# EAGLE board 10AxisFeatherWingLE (EAGLE 9.5.2)
REV: B
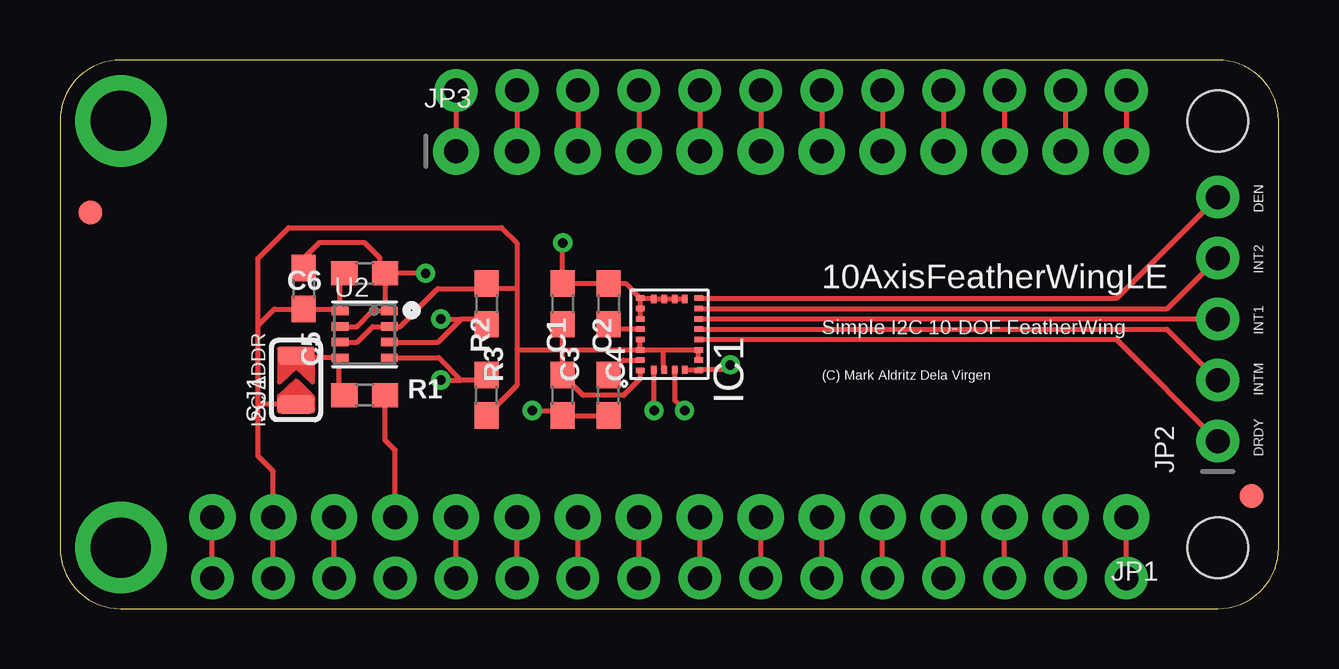
[diagram p0: board, top side]
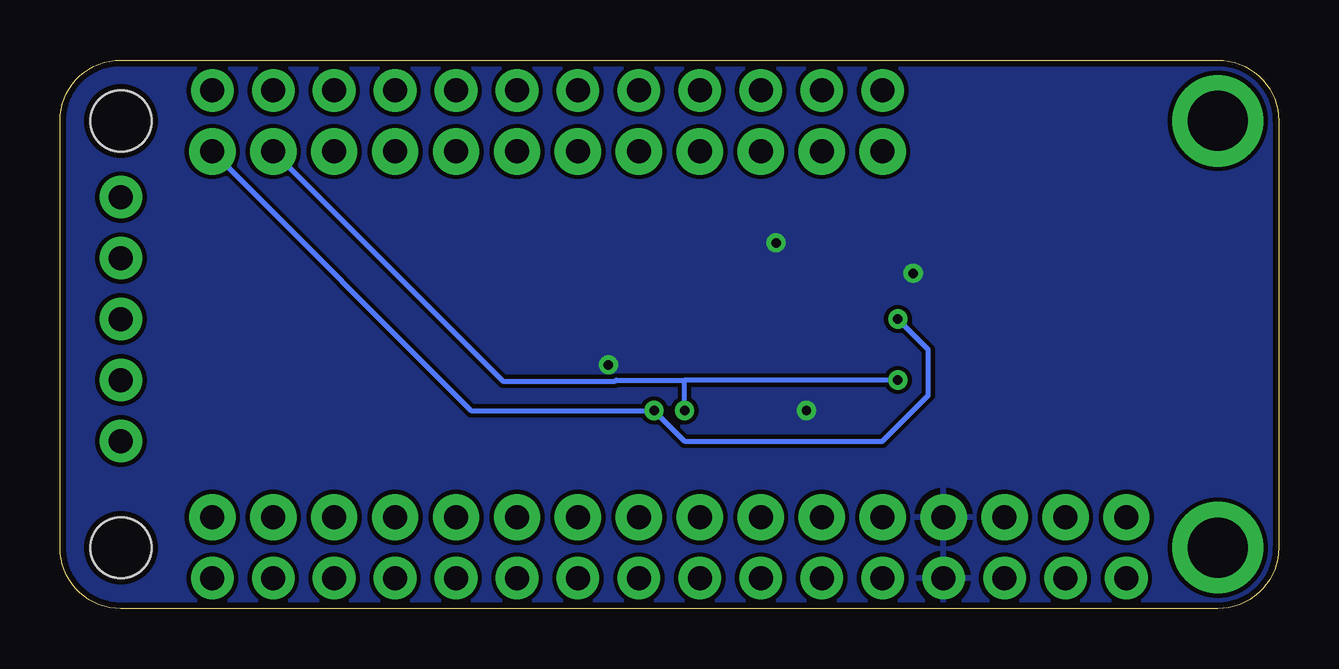
[diagram p1: board, bottom side, seen from below]

Size 50.8 x 22.86 mm. Coordinates in mm from the lower left corner, seen from the top.
Copper layers (1*16): Top 0.035mm / dielectric 1.5mm / Bottom 0.035mm
Design rules "adafruit *": minimum track width 8mil, minimum drill 15.5mil, track to track 7mil, track to pad 7mil, pad to pad 7mil, via to via 7mil, smd to smd 7mil, copper to edge 10mil, drill to drill 8mil, minimum pad ring 10mil, minimum via ring 8mil, stop-mask expansion 2mil, vias tented up to drill 20mil, thermal gap 10mil

## Footprints (pad centres in the part's own frame; a part is rotated, then mirrored left to right if it is on the bottom)
0603-NO = smd 1.1 x 1: 1 -0.85,0; 2 0.85,0
FIDUCIAL_1MM = smd 1 x 1: 1 0,0
LGA24_3.5X3.1MM = smd 0.23 x 0.35: 1 -1.505,1.22; 6 -1.505,-1.22; 7 -1.075,-1.22; 8 -0.645,-1.22; 9 -0.215,-1.22; 10 0.215,-1.22; 11 0.645,-1.22; 12 1.075,-1.22; 13 1.505,-1.22; 18 1.505,1.22; 19 1.075,1.22; 20 0.645,1.22; 21 0.215,1.22; 22 -0.215,1.22; 23 -0.645,1.22; 24 -1.075,1.22 | smd 0.35 x 0.23: 2 -1.475,0.645; 3 -1.475,0.215; 4 -1.475,-0.215; 5 -1.475,-0.645; 14 1.475,-0.645; 15 1.475,-0.215; 16 1.475,0.215; 17 1.475,0.645
1X16_ROUND_76MIL = drill 1 pad 1.93: 1 -19.05,0; 2 -16.51,0; 3 -13.97,0; 4 -11.43,0; 5 -8.89,0; 6 -6.35,0; 7 -3.81,0; 8 -1.27,0; 9 1.27,0; 10 3.81,0; 11 6.35,0; 12 8.89,0; 13 11.43,0; 14 13.97,0; 15 16.51,0; 16 19.05,0
1X05_ROUND_70 = drill 1 pad 1.778: 1 -5.08,0; 2 -2.54,0; 3 0,0; 4 2.54,0; 5 5.08,0
1X12_ROUND_76MIL = drill 1 pad 1.93: 1 -13.97,0; 2 -11.43,0; 3 -8.89,0; 4 -6.35,0; 5 -3.81,0; 6 -1.27,0; 7 1.27,0; 8 3.81,0; 9 6.35,0; 10 8.89,0; 11 11.43,0; 12 13.97,0
FEATHERWING = drill 1 pad 1.778: 1 6.35,1.27; 2 8.89,1.27; 3 11.43,1.27; 4 13.97,1.27; 5 16.51,1.27; 6 19.05,1.27; 7 21.59,1.27; 8 24.13,1.27; 9 26.67,1.27; 10 29.21,1.27; 11 31.75,1.27; 12 34.29,1.27; 13 36.83,1.27; 14 39.37,1.27; 15 41.91,1.27; 16 44.45,1.27; 17 44.45,21.59; 18 41.91,21.59; 19 39.37,21.59; 20 36.83,21.59; 21 34.29,21.59; 22 31.75,21.59; 23 29.21,21.59; 24 26.67,21.59; 25 24.13,21.59; 26 21.59,21.59; 27 19.05,21.59; 28 16.51,21.59 | drill 2.5 pad 3.81: P$1 2.54,20.32; P$2 2.54,2.54 | hole 2.54: 48.26,20.32; 48.26,2.54
SOLDERJUMPER_ARROW_NOPASTE = smd 0.762 x 1.524: 1 -1.016,0; 2 1.016,0
BME280 = smd 0.7 x 0.35: 1 1.025,0.975; 2 1.025,0.325; 3 1.025,-0.325; 4 1.025,-0.975; 5 -1.025,-0.975; 6 -1.025,-0.325; 7 -1.025,0.325; 8 -1.025,0.975

## Placement (x,y rotation side)
C1  10uF  [0603-NO]  20.95,8.89 90 top
C2  0.1uF  [0603-NO]  22.86,8.89 90 top
C3  0.1uF  [0603-NO]  20.95,12.7 270 top
C4  10nF  [0603-NO]  22.86,12.7 270 top
C5  0.1uF  [0603-NO]  10.16,13.34 270 top
C6  10uF  [0603-NO]  12.7,13.97 180 top
FID1  FIDUCIAL_1MM  [FIDUCIAL_1MM]  49.66,4.7 0 top
FID2  FIDUCIAL_1MM  [FIDUCIAL_1MM]  1.27,16.51 0 top
IC1  LSM9DS1  [LGA24_3.5X3.1MM]  25.4,11.43 90 top
JP1  JP1  [1X16_ROUND_76MIL]  25.4,3.81 180 top
JP2  [1X05_ROUND_70]  48.26,12.06 90 top
JP3  JP2  [1X12_ROUND_76MIL]  30.48,19.05 0 top
MS1  FEATHERWING  [FEATHERWING]  0,0 0 top
R1  10K  [0603-NO]  12.7,8.89 0 top
R2  10K  [0603-NO]  17.78,8.89 90 top
R3  10K  [0603-NO]  17.78,12.7 270 top
SJ1  [SOLDERJUMPER_ARROW_NOPASTE]  9.84,9.53 90 top
U2  BME280  [BME280]  12.7,11.43 0 top

## Library data of the parts
C1-C6 = microbuilder; SPICEPREFIX: C
FID1 FID2 = microbuilder; BOM: EXCLUDE
IC1 JP1-JP3 MS1 U2 = microbuilder
R1-R3 = microbuilder; SPICEPREFIX: R
SJ1 = microbuilder; BOM: EXCLUDE; SPICEPREFIX: B

## Nets
3.3V: C1.2 C3.2 C5.2 C6.2 IC1.1 IC1.3 IC1.7 IC1.8 IC1.22 IC1.23 JP1.15 MS1.2 R2.1 R3.1 SJ1.1 U2.2 U2.6 U2.8
5: JP3.10 MS1.19
6: JP3.9 MS1.20
9: JP3.8 MS1.21
10: JP3.7 MS1.22
11: JP3.6 MS1.23
12: JP3.5 MS1.24
13: JP3.4 MS1.25
A0: JP1.12 MS1.5
A1: JP1.11 MS1.6
A2: JP1.10 MS1.7
A3: JP1.9 MS1.8
A4: JP1.8 MS1.9
A5: JP1.7 MS1.10
AREF: JP1.14 MS1.3
C1: C2.2 IC1.24
CAP: C4.2 IC1.21
DEN_A/G: IC1.13 JP2.5
DRDY_M: IC1.9 JP2.1
EN: JP3.2 MS1.27
GND: C1.1 C2.1 C3.1 C4.1 C5.1 C6.1 IC1.5 IC1.6 IC1.14 IC1.15 IC1.16 IC1.17 IC1.18 IC1.19 IC1.20 JP1.13 MS1.4 R1.2 U2.1 U2.7
INT1_A/G: IC1.11 JP2.3
INT2_A/G: IC1.12 JP2.4
INT_M: IC1.10 JP2.2
MISO: JP1.4 MS1.13
MOSI: JP1.5 MS1.12
NC: JP1.1 MS1.16
RESET: JP1.16 MS1.1
RX: JP1.3 MS1.14
SCK: JP1.6 MS1.11
SCL: IC1.2 JP3.11 MS1.18 R2.2 U2.4
SDA: IC1.4 JP3.12 MS1.17 R3.2 U2.3
SDO: R1.1 SJ1.2 U2.5
TX: JP1.2 MS1.15
USB: JP3.3 MS1.26
VBAT: JP3.1 MS1.28

## Tracks (layer width: path | path; a pad name or v marks a point on that pad's centre or on a via)
3.3V
  Top 0.203: C6.2 11.68,13.79 U2.8 11.6,12.48 C5.2 8.93,12.48 8.26,11.81 | U2.6 12.38,11.11 13.03,11.76 U2.2 14.17,11.76 15.75,13.34 17.57,13.34 R3.1 18,13.34 19.05,13.34 | 8.26,8.51 8.26,11.81 | 8.26,8.51 8.26,6.35 8.89,5.71 JP1.15 MS1.2 | SJ1.1 8.26,8.51 | 8.26,11.81 8.26,14.61 9.53,15.88 18.41,15.88 19.05,15.24 19.05,13.34 | 19.05,13.34 19.05,10.79 | 19.05,10.79 19.05,9.31 R2.1 | 19.05,10.79 20.95,10.79 | 20.95,10.79 C3.2 | 20.95,10.79 C1.2 21.8,8.89 23.5,8.89 24.18,9.57 IC1.1 | 20.95,10.79 IC1.23 | IC1.23 IC1.22 | IC1.23 25.15,10.79 | 25.15,10.79 IC1.8 IC1.7 | IC1.3 25.15,9.99 25.15,10.25 25.15,10.79
5
  Top 0.203: MS1.19 JP3.10
6
  Top 0.203: MS1.20 JP3.9
9
  Top 0.203: MS1.21 JP3.8
10
  Top 0.203: MS1.22 JP3.7
11
  Top 0.203: MS1.23 JP3.6
12
  Top 0.203: MS1.24 JP3.5
13
  Top 0.203: MS1.25 JP3.4
A0
  Top 0.203: MS1.5 JP1.12
A1
  Top 0.203: MS1.6 JP1.11
A2
  Top 0.203: MS1.7 JP1.10
A3
  Top 0.203: MS1.8 JP1.9
A4
  Top 0.203: MS1.9 JP1.8
A5
  Top 0.203: MS1.10 JP1.7
AREF
  Top 0.203: MS1.3 JP1.14
C1
  Top 0.203: C2.2 23.48,10.36 IC1.24
CAP
  Top 0.203: IC1.21 23.07,11.64 C4.2
DEN_A/G
  Top 0.203: IC1.13 44.05,12.94 JP2.5
DRDY_M
  Top 0.203: IC1.9 44.03,11.21 JP2.1
EN
  Top 0.203: MS1.27 JP3.2
GND  (via drill 0.39)
  Top 0.203: U2.7 12.39,11.76 13.04,12.4 13.46,12.4 | 13.46,12.4 U2.1 | C6.1 13.55,12.49 13.46,12.4 | C5.1 10.16,14.61 10.79,15.24 12.7,15.24 13.34,14.61 13.34,14.19 C6.1 | JP1.13 13.97,6.6 13.55,7.02 R1.2 | v15.24,13.97 C6.1 | IC1.5 26.59,9.96 | 26.59,9.96 IC1.6 | v27.94,10.16 27.73,9.96 26.59,9.96 | IC1.18 23.57,13.55 C4.1 C3.1 v20.95,15.24 | v19.68,8.26 20.74,8.26 C1.1 C2.1 | IC1.18 24.73,12.94 IC1.17 IC1.16 IC1.15 IC1.14 | IC1.18 IC1.19 IC1.20
  pour Bottom: 0,0 50.8,0 50.8,22.86 0,22.86
INT1_A/G
  Top 0.203: IC1.11 48.25,12.07 JP2.3
INT2_A/G
  Top 0.203: IC1.12 46.16,12.51 JP2.4
INT_M
  Top 0.203: IC1.10 46.14,11.64 JP2.2
MISO
  Top 0.203: MS1.13 JP1.4
MOSI
  Top 0.203: MS1.12 JP1.5
NC
  Top 0.203: MS1.16 JP1.1
RESET
  Top 0.203: MS1.1 JP1.16 6.99,4.45
RX
  Top 0.203: MS1.14 JP1.3
SCK
  Top 0.203: MS1.11 JP1.6
SCL  (via drill 0.39)
  Top 0.203: U2.4 15.79,10.46 16.73,9.53 | 16.73,9.53 17.57,9.53 R2.2 | v24.77,8.26 24.75,8.27 IC1.2 | v15.88,9.53 16.73,9.53 | MS1.18 JP3.11
  Bottom 0.203: v15.88,9.53 24.77,9.53 | 24.77,9.53 27.61,9.53 27.66,9.48 32.34,9.48 JP3.11 | v24.77,8.26 24.77,9.53
SDA  (via drill 0.39)
  Top 0.203: U2.3 15.77,11.11 16.73,12.06 | 16.73,12.06 17.57,12.06 R3.2 | IC1.4 25.61,8.68 v26.04,8.26 | v15.88,12.06 16.73,12.06 | MS1.17 JP3.12
  Bottom 0.203: JP3.12 33.66,8.26 v26.04,8.26 24.77,6.99 16.51,6.99 14.61,8.89 14.61,10.79 v15.88,12.06
SDO
  Top 0.203: R1.1 11.64,9.1 11.64,10.43 U2.5 9.93,10.46 SJ1.2
TX
  Top 0.203: MS1.15 JP1.2
USB
  Top 0.203: MS1.26 JP3.3
VBAT
  Top 0.203: MS1.28 JP3.1

## Text on the board
tPlace: DEN | INT2 | 10AxisFeatherWingLE | Simple I2C 10-DOF FeatherWing | INT1 | I2C ADDR | (C) Mark Aldritz Dela Virgen | INTM | DRDY